# EAGLE board chirp-v2.4 (EAGLE 7.2.0)
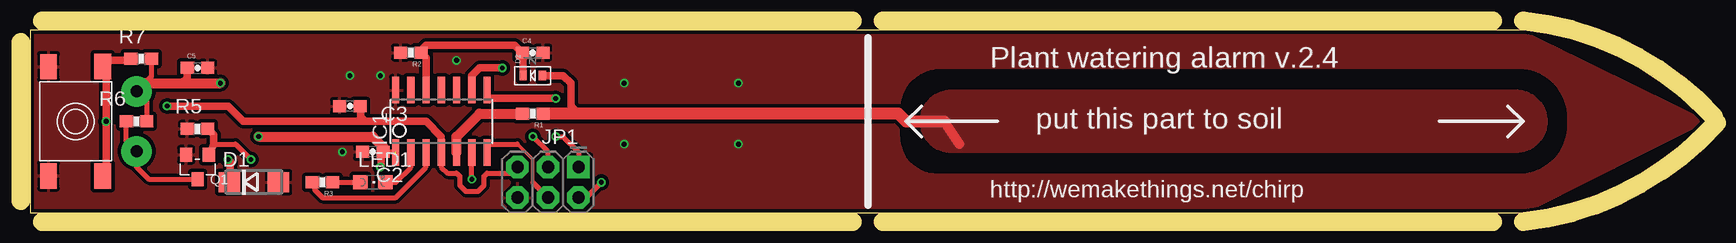
[diagram p0: board, top side]
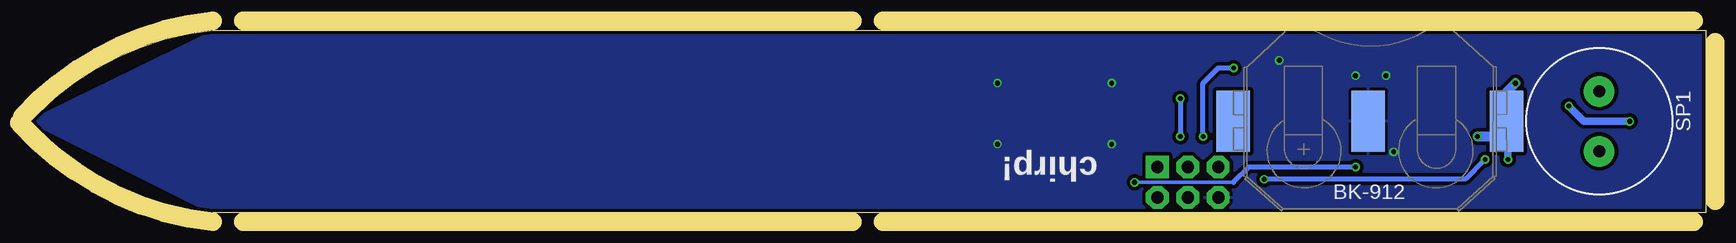
[diagram p1: board, bottom side, seen from below]

Size 139.7 x 15.23 mm. Coordinates in mm from the lower left corner, seen from the top.
Outline: 0,0 124.46,0 arc39 139.06,6.99 139.7,7.62 139.06,8.26 arc39 124.46,15.23 0,15.23 0,0
Copper layers (1*16): Top 0.035mm / dielectric 1.5mm / Bottom 0.035mm
Design rules "Fusion_eagle_rule_v1.1": minimum track width 6mil, minimum drill 12mil, track to track 6mil, track to pad 6mil, pad to pad 6mil, via to via 6mil, smd to smd 0mil, copper to edge 10mil, drill to drill 10mil, minimum pad ring 10mil, minimum via ring 6mil, stop-mask expansion 2mil, vias tented up to drill 100mil, thermal gap 10mil
Milling: 8 lines

## Footprints (pad centres in the part's own frame; a part is rotated, then mirrored left to right if it is on the bottom)
BAT-HLD-001 = smd 2.79 x 5.08: 1 -11.51,0; 2 0,0; 3 11.25,0
0603-CAP = smd 1.1 x 1: 1 -0.85,0; 2 0.85,0
DO214AC = smd 1.8 x 1.7: A 2.05,0; C -2.05,0
SOD-523 = smd 0.8 x 0.6: A 0,-0.8; K 0,0.8
SOIC14 = smd 0.61 x 2.21: 1 -3.81,-2.603; 2 -2.54,-2.603; 3 -1.27,-2.603; 4 0,-2.603; 5 1.27,-2.603; 6 2.54,-2.603; 7 3.81,-2.603; 8 3.81,2.603; 9 2.54,2.603; 10 1.27,2.603; 11 0,2.603; 12 -1.27,2.603; 13 -2.54,2.603; 14 -3.81,2.603
2X3-NS = drill 1.016 pad 1.88 square: 1 -2.54,-1.27 | drill 1.016 pad 1.88 octagon: 2 -2.54,1.27; 3 0,-1.27; 4 0,1.27; 5 2.54,-1.27; 6 2.54,1.27
CHIPLED_0805 = smd 1.2 x 1.2: A 0,-1.05; C 0,1.05
SOT23 = smd 1.016 x 1.143: 1 -0.95,-1.016; 2 0.95,-1.016; 3 0,1.016
0603-RES = smd 1.1 x 1: 1 -0.85,0; 2 0.85,0
PS12 = drill 1 pad 2.54: P$1 -2.5,0; P$2 2.5,0
FSMJSMA = smd 2.108 x 1.397: A -4.547,-2.261; A' 4.568,-2.261; B -4.547,2.261; B' 4.547,2.261

## Placement (x,y rotation side)
B1  [BAT-HLD-001]  28.14,7.62 180 bottom
C2  100nF  [0603-CAP]  28.57,5.08 180 top
C3  100nF  [0603-CAP]  26.67,8.89 180 top
C4  1uF  [0603-CAP]  41.91,13.34 0 top
C5  1uF  [0603-CAP]  13.97,12.06 0 top
D1  [DO214AC]  18.67,2.54 0 top
D2  DIODE-SCHOTTKY_  [SOD-523]  41.91,11.43 90 top
IC1  TINY24/44/84-SSU  [SOIC14]  34.29,7.62 0 top
JP1  AVR_SPI_PRG_6NS  [2X3-NS]  43.18,2.54 180 top
LED1  [CHIPLED_0805]  28.57,2.54 270 top
Q1  [SOT23]  13.97,3.81 180 top
R1  10K  [0603-RES]  41.91,8.26 180 top
R2  510K  [0603-RES]  31.75,13.34 180 top
R3  100R  [0603-RES]  24.38,2.54 180 top
R5  10K  [0603-RES]  13.97,6.99 0 top
R6  1K  [0603-RES]  8.89,7.62 0 top
R7  10K  [0603-RES]  9.27,12.83 0 top
SP1  SPEAKER/PS12  [PS12]  8.89,7.62 270 bottom
SW1  SPST_TACTFSMJSMA  [FSMJSMA]  3.81,7.62 90 top

## Library data of the parts
B1 C2-C5 JP1 R1-R3 R5-R7 = SparkFun
D1 = diode
D2 = microbuilder
IC1 = avr-5
LED1 SP1 SW1 = adafruit
Q1 = Seeed-Discrete

## Nets
BUZZER: IC1.6 Q1.1 R5.2
CAPACITANCE_V: C4.1 D2.K IC1.12 R2.1
CLK_OUT: IC1.5 R1.2
GND: B1.2 C2.2 C3.2 C4.2 C5.2 D1.A IC1.14 JP1.6 Q1.2 R2.2 R5.1 SW1.B SW1.B'
LED_A: IC1.3 R3.2
LED_K: IC1.2 LED1.C
MISO: IC1.8 JP1.1
MOSI: IC1.7 JP1.4
N$1: Q1.3 R6.1 SP1.P$2
N$2: LED1.A R3.1
RESET: C3.1 IC1.4 JP1.5 R7.1 SW1.A SW1.A'
SCK: IC1.9 JP1.3
V_CAP: D2.A R1.1
VCC: B1.1 C2.1 C5.1 D1.C IC1.1 JP1.2 R6.2 R7.2 SP1.P$1

## Tracks (layer width: path | path; a pad name or v marks a point on that pad's centre or on a via)
BUZZER  (via drill 0.4 pad 0.3)
  Top 0.406: v36.83,2.79 IC1.6 | v18.41,4.45 17.14,5.71 15.31,5.71
  Top 0.61: Q1.1 15.31,5.71 15.31,6.5 R5.2
  Bottom 0.406: v36.83,2.79 20.07,2.79 v18.41,4.45
CAPACITANCE_V
  Top 0.406: 33.02,12.91 R2.1 32.6,13.55
  Top 0.61: 33.02,12.91 IC1.12 | 32.6,13.55 33.02,13.97 40.4,13.97 C4.1 41.11,13.29 D2.K
CLK_OUT
  Top 0.813: IC1.5 35.56,6.35 37.47,8.26 R1.2
GND  (via drill 0.4, 0.4 pad 0.3)
  other vias: 26.67,11.43 29.21,11.43 26.04,5.08 35.56,12.7 59.05,10.79 59.05,5.71 49.53,10.79 49.53,5.71
  pour Top (isolate 0.305): 0,15.23 0,0 72.39,0 72.39,15.23
  pour Bottom (isolate 0.305): 0,15.23 124.13,15.23 139.7,7.62 124.46,0 0,0
  pour Top (isolate 0.305, no thermals): 72.39,15.23 124.13,15.23 139.7,7.62 124.46,0 72.39,0 72.39,6.35 arc90 75.56,3.17 123.83,3.17 arc90 128.27,6.99 128.27,8.26 arc90 123.83,12.06 76.2,12.06 arc90 72.39,8.89
LED_A
  Top 0.406: IC1.3 33.02,3.81 30.48,1.27 24.38,1.27 23.75,1.91 23.75,2.33 R3.2
LED_K
  Top 0.406: IC1.2 31.75,3.81 30.48,2.54 LED1.C
MISO  (via drill 0.4 pad 0.3)
  Top 0.406: JP1.1 45.72,5.08 44.45,6.35 v43.81,6.35 | IC1.8 38.16,10.16
  Top 0.61: v43.81,9.53 38.1,9.53 IC1.8
  Bottom 0.406: v43.81,9.53 v43.81,6.35
MOSI
  Top 0.305: 41.91,2.54 41.91,4.45 40.64,5.71
  Top 0.406: 41.91,2.54 JP1.4 | 40.64,5.71 38.16,5.71 IC1.7
N$1
  Top 0.406: Q1.3 9.91,2.79 8.89,3.81 SP1.P$2 8.04,5.97 R6.1
N$2
  Top 0.406: R3.1 LED1.A
RESET  (via drill 0.4 pad 0.3)
  Top 0.406: R7.1 8.03,12.83 | IC1.4 34.29,3.81 34.8,3.3 35.56,3.3 35.81,3.05 35.81,2.29 36.32,1.78 37.34,1.78 37.85,2.29 37.85,3.05 38.1,3.3 40.13,3.3 JP1.5
  Top 0.61: v11.43,8.89 16.51,8.89 17.78,7.62 27.94,7.62 | 27.94,7.62 33.02,7.62 34.29,6.35 IC1.4 | C3.1 27.55,8.02 27.94,7.62 | SW1.A 6.35,3.35 v6.35,7.62 6.35,11.91 SW1.A' 6.07,12.68 6.1,12.7 7.9,12.7 8.03,12.83
  Bottom 0.61: v11.43,8.89 10.16,7.62 v6.35,7.62
SCK  (via drill 0.4 pad 0.3)
  Top 0.406: JP1.3 43.18,5.08 v41.91,6.35
  Top 0.61: v39.37,12.06 37.47,12.06 36.83,11.43 IC1.9
  Bottom 0.406: v41.91,6.35 41.91,10.79 40.64,12.06 v39.37,12.06
V_CAP
  Top 0.61: D2.A 44.45,11.43 45.09,10.79 45.09,8.89 45.72,8.26
  Top 0.813: 76.2,7.62 77.45,5.74
  Top 1.016: 76.2,7.62 73.03,7.62 72.39,8.26 45.72,8.26 R1.1
  pour Top (no thermals): 74.3,7.62 arc-90 76.83,10.16 123.83,10.16 arc-90 126.36,7.62 arc-90 123.83,5.08 76.83,5.08 arc-90
VCC  (via drill 0.4 pad 0.3)  (1 unrouted)
  Top 0.406: JP1.2 46.35,1.27 v47.62,2.54 | 29.27,3.81 v29.21,3.81 | C2.1 30.42,5.08 | R6.2 9.74,9.27 SP1.P$1 | R7.2 10.12,11.35 9.42,10.65
  Top 0.61: 29.27,3.81 29.27,4.93 C2.1 | C5.1 13.12,11.21 12.7,10.79 | SP1.P$1 9.61,10.67 | D1.C 16.71,4.24 v16.51,4.45
  Top 0.813: v15.88,10.79 12.7,10.79 9.56,10.79 9.42,10.65 SP1.P$1 | C2.1 29.45,5.47 28.57,6.35 v19.05,6.35
  Bottom 0.305: 39.37,2.54 v47.62,2.54
  Bottom 0.406: 39.37,2.54 38.1,3.81 v29.21,3.81 | B1.1 17.92,6.35
  Bottom 0.61: 16.63,10.04 B1.1 16.51,7.52 v16.51,4.45
  Bottom 0.813: v15.88,10.79 16.63,10.04 | 17.92,6.35 v19.05,6.35

## Text on the board
tNames: Plant watering alarm v.2.4 | put this part to soil | http://wemakethings.net/chirp
bNames: chirp!
_tsilk: CERN OHL | v.1.1 | ISP